# Altium PCB Pulse_sensor2233.PcbDoc
Units mil, origin at the board's own origin, x right, y up, seen from the top; angles counter-clockwise.
Board outline 6000 x 4000 mil, 2 copper layers (Top Layer, Bottom Layer); 14 components, 22 nets, 81 pads, 0 vias.
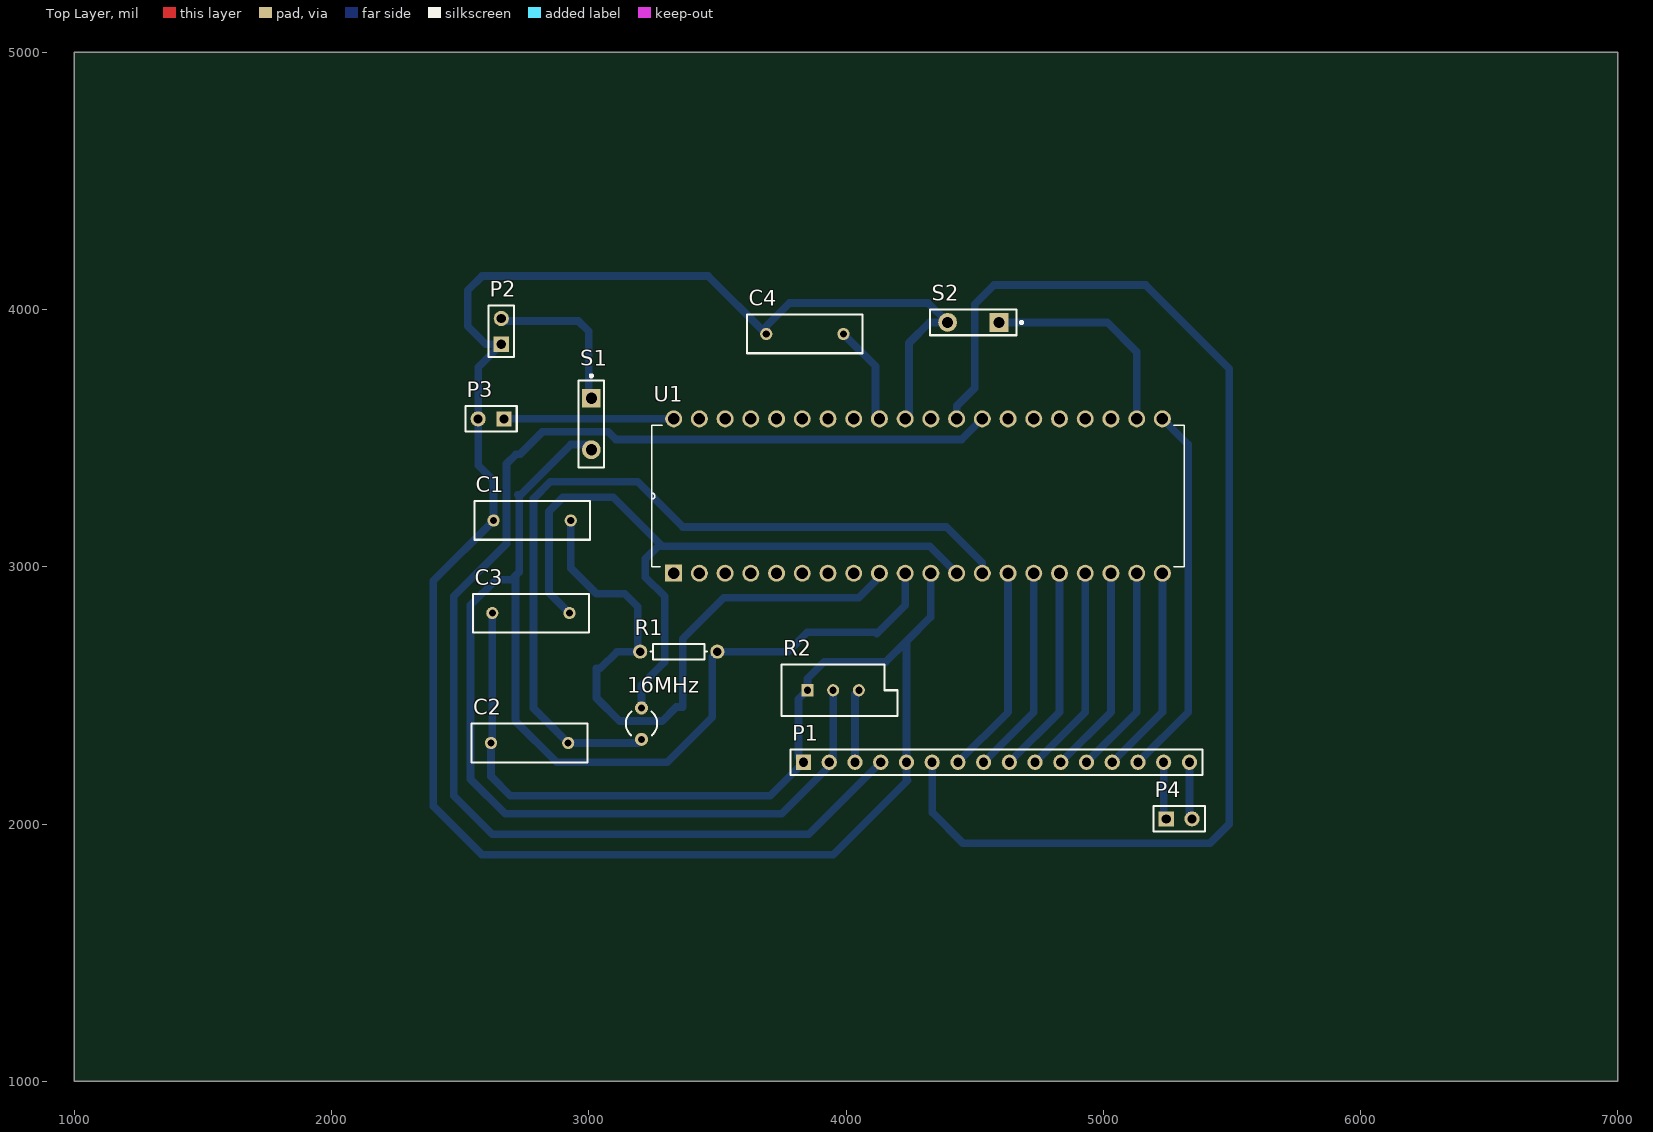
[diagram p0: Top Layer view]
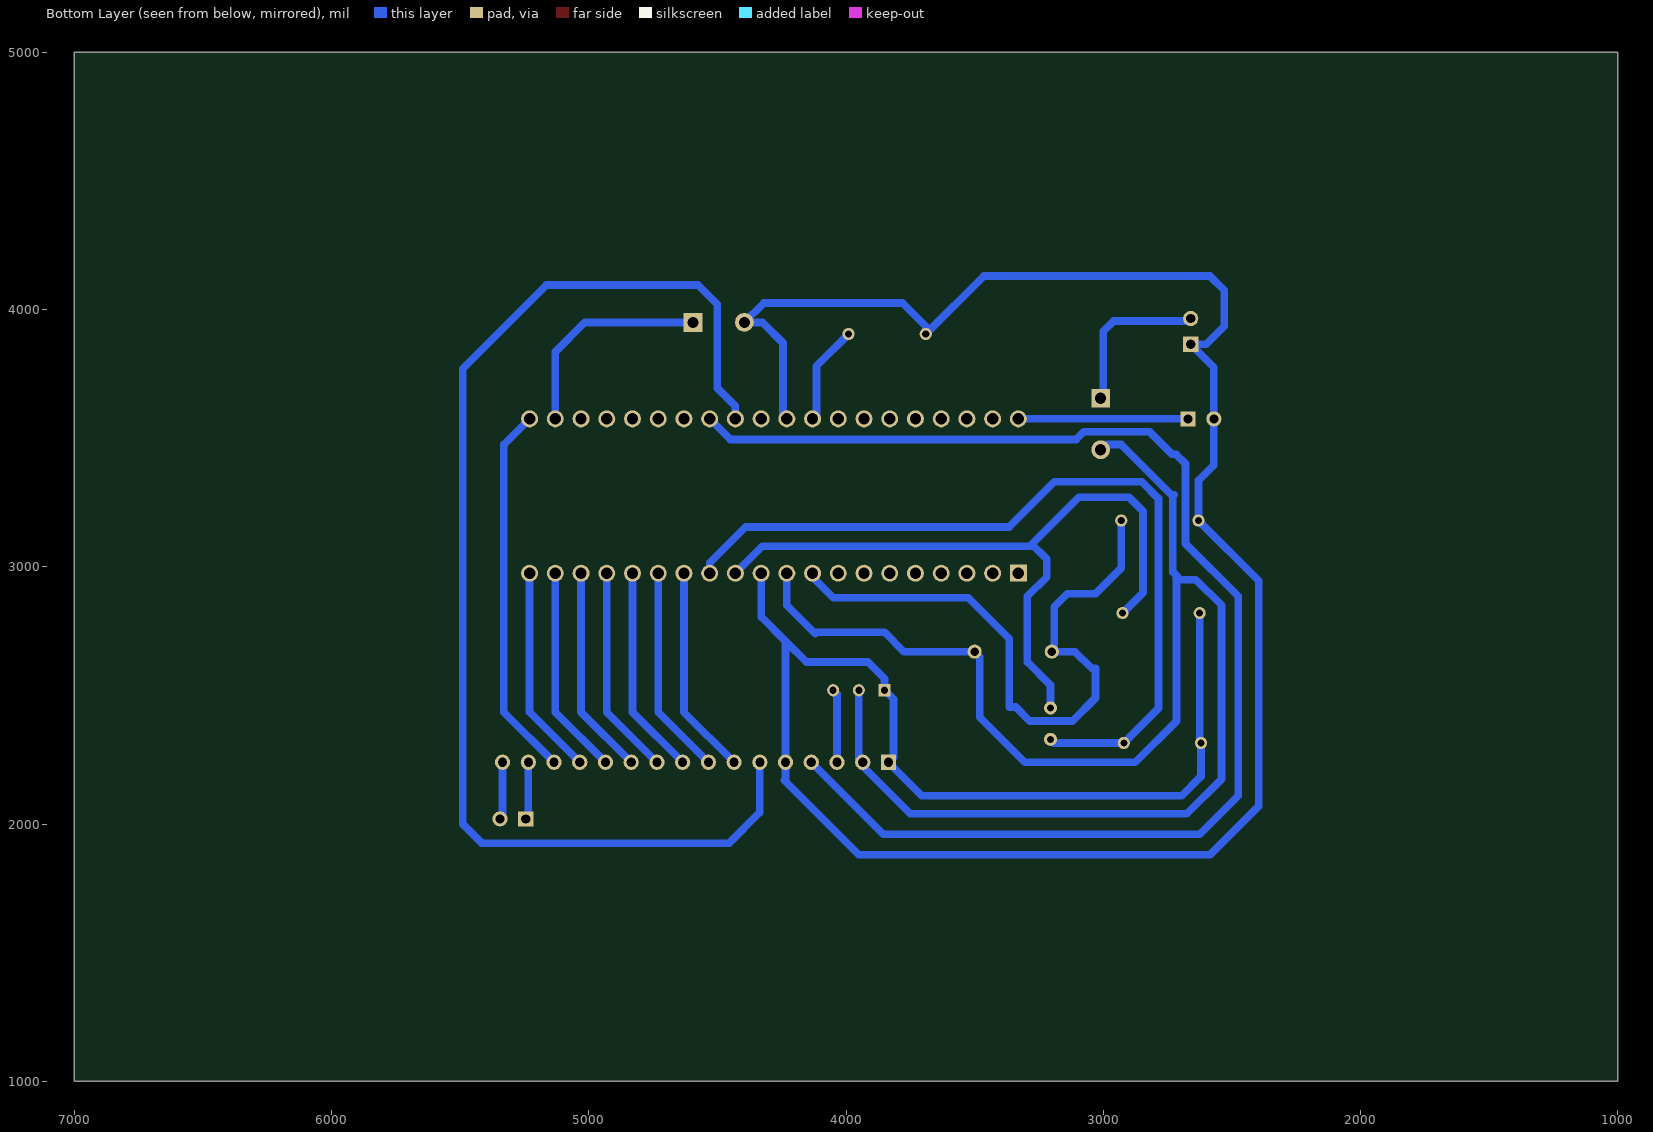
[diagram p1: Bottom Layer view, seen from below]

## Layer stack, top to bottom
Top Solder: solder mask 0.4, Solder Resist, Dk 3.5
Top Layer: signal copper 1.4
Dielectric 1: dielectric 12.6, FR-4, Dk 4.8
Bottom Layer: signal copper 1.4
Bottom Solder: solder mask 0.4, Solder Resist, Dk 3.5

## Board outline
1000,1000 7000,1000 7000,5000 1000,5000

## Design rules (kind name [scope] priority, off if disabled: settings)
Clearance [All] p1: gap=10 ignorepadtopadclearanceinfootprint=FALSE except(0: Arc-Hole Track-Hole SMDPad-Hole THPad-Hole Via-Hole Fill-Hole Poly-Hole Region-Hole Text-Hole)
PolygonConnect [All] p1: connectstyle=Relief reliefconductorwidth=10 reliefentries=4 polygonreliefangle="90 Angle" airgapwidth=10
RoomDefinition Pulse_sensor [InComponentClass('Pulse_sensor')] p1: confinementstyle=ConfineIn formatcopy=TRUE lockcomponents=FALSE outline 2320,1800 5555,1800 5555,4220 2320,4220
RoutingLayers [All] p1: top layer_v5=FALSE bottom layer_v5=TRUE
RoutingVias [All] p1: holewidth=28 width=50 viastyle="Through Hole" minholewidth=28 minwidth=50 maxholewidth=28 maxwidth=50
SolderMaskExpansion [All] p1: expansion=4
Width [All] p1: maxlimit=30 minlimit=10 preferedwidth=30 toplayer_maxwidth=10 toplayer_prefwidth=10 bottomlayer_minwidth=24 minimp=50.000000 maximp=50.000000 favimp=50.000000
29 further rules are at their usual default settings.

## Classes and differential pairs
component class Pulse_sensor: 16MHz C1 C2 C3 C4 P1 P2 P3 R1 R2 S1 S2 U1

## Components (designator, comment, footprint, x,y, rotation, side; value= is the part's Value field where it differs from the comment)
16MHz "Crystal" R38 3205,2390 r180 top
C1 "Cap" RAD-0.3 2780,3180 r0 top value=10uF
C2 "Cap" RAD-0.3 2770,2315 r0 top value=22pF
C3 "Cap" RAD-0.3 2775,2820 r0 top value=22pF
C4 "Cap" RAD-0.3 3840,3905 r0 top value=100nF
P1 "Header 16" HDR1X16 3835,2240 r0 top
P2 "Header 2" HDR1X2 2660,3865 r90 top
P3 "Header 2" HDR1X2 2670,3575 r180 top
P4 "Comment" HDR1X2 5245,2020 r0 top
R1 "Res1" AXIAL-0.3 3350,2670 r0 top value=10K
R2 "RPot" VR5 3950,2520 r0 top value=10K
S1 "SW-SPST" SPST-2 3010,3555 r270 top
S2 "SW-PB" SPST-2 4495,3950 r180 top
U1 "ATMEGA32A-PU" DIP254P1524X482-40 5230,3575 r90 top

## Footprints (in the part's own frame and the unit in brackets; to place one, negate y for a bottom-side part, rotate by r counter-clockwise, add the part's x,y. Pads: shape width x height; smd on the part's side, far side on the other; paste and mask are expansions set on the pad)
AXIAL-0.3 [mm] "Axial Device, Thru-Hole; 2 Leads; 0.3 in Pin Spacing"
  round 1.4 hole 0.85: 1(-3.81,0) 2(3.81,0)
  silkscreen extent -2.77,-0.76 2.77,0.76
DIP254P1524X482-40 [mil]
  rect 66x66 hole 44: 1(-600,1900)
  round 66 hole 44: 2(-600,1800) 3(-600,1700) 4(-600,1600) 5(-600,1500) 6(-600,1400) 7(-600,1300) 8(-600,1200) 9(-600,1100) 10(-600,1000) 11(-600,900) 12(-600,800) 13(-600,700) 14(-600,600) 15(-600,500) 16(-600,400) 17(-600,300) 18(-600,200) 19(-600,100) 20(-600,0) 21(0,0) 22(0,100) 23(0,200) 24(0,300) 25(0,400) 26(0,500) 27(0,600) 28(0,700) 29(0,800) 30(0,900) 31(0,1000) 32(0,1100) 33(0,1200) 34(0,1300) 35(0,1400) 36(0,1500) 37(0,1600) 38(0,1700) 39(0,1800) 40(0,1900)
  silkscreen extent -575,-85 -25,1985
HDR1X2 [mm] "Connector; Header; 2 Position"
  rect 1.5x1.5 hole 0.9: 1(0,0)
  round 1.5 hole 0.9: 2(2.54,0)
  silkscreen extent -1.27,-1.27 3.81,1.27
HDR1X16 [mm] "Connector; Header; 16 Position"
  rect 1.5x1.5 hole 0.9: 1(0,0)
  round 1.5 hole 0.9: 2(2.54,0) 3(5.08,0) 4(7.62,0) 5(10.16,0) 6(12.7,0) 7(15.24,0) 8(17.78,0) 9(20.32,0) 10(22.86,0) 11(25.4,0) 12(27.94,0) 13(30.48,0) 14(33.02,0) 15(35.56,0) 16(38.1,0)
  silkscreen extent -1.27,-1.27 39.37,1.27
R38 [mm] "Crystal, Thru-Hole; 2 Leads; Body 3.1 x 8.2 mm (Dia.xH)"
  round 1.3 hole 0.7: 1(0,1.55) 2(0,-1.55)
  silkscreen extent -1.55,-1.19 1.55,1.17
RAD-0.3 [mm] "Radial Cap, Thru-Hole; 2 Leads; 0.3 in Pin Spacing"
  round 1.2 hole 0.7: 1(-3.81,0) 2(3.81,0)
  silkscreen extent -5.71,-1.91 5.71,1.91
SPST-2 [mm] "Switch; 2 Leads"
  rect 1.85x1.85 hole 1.1: 1(-2.54,0)
  round 1.85 hole 1.1: 2(2.54,0)
  silkscreen extent -4.89,-1.27 4.28,1.27
VR5 [mm] "Thru-Hole; 3 Leads"
  rect 1.2x1.2 hole 0.7: 1(-2.54,0)
  round 1.2 hole 0.7: 2(0,0) 3(2.54,0)
  silkscreen extent -5.08,-2.54 6.35,2.54

## Part data
16MHz: library part XTAL, "Crystal Oscillator", LatestRevisionDate=17-Jul-2002, LatestRevisionNote="Re-released for DXP Platform.", PackageDescription="Crystal, Thru-Hole; 2 Leads; Body 3.1 x 8.2 mm (Dia.xH)", PackageReference=R38, Published=8-Jun-2000, Publisher="Altium Limited"
C1 C2 C3 C4: "Capacitor", LatestRevisionDate=17-Jul-2002, LatestRevisionNote="Re-released for DXP Platform.", PackageDescription="Radial Cap, Thru-Hole; 2 Leads; 0.3 in Pin Spacing", PackageReference=RAD-0.3, Published=8-Jun-2000, Publisher="Altium Limited"
P1: "Header, 16-Pin", LatestRevisionDate=17-Jul-2002, LatestRevisionNote="Re-released for DXP Platform.", Publisher="Altium Limited"
P2 P3: "Header, 2-Pin", LatestRevisionDate=17-Jul-2002, LatestRevisionNote="Re-released for DXP Platform.", Publisher="Altium Limited"
R1: "Resistor", LatestRevisionDate=17-Jul-2002, LatestRevisionNote="Re-released for DXP Platform.", PackageDescription="Axial Device, Thru-Hole; 2 Leads; 0.3 in Pin Spacing", PackageReference=AXIAL-0.3, Published=8-Jun-2000, Publisher="Altium Limited"
R2: "Potentiometer", LatestRevisionDate=17-Jul-2002, LatestRevisionNote="Re-released for DXP Platform.", PackageDescription="Variable Resistor, Thru-Hole; 3 Leads", PackageReference=VR5, Published=8-Jun-2000, Publisher="Altium Limited", Set Position=0.5, Sim Note="Enter the Resistance value and the set point into parameter fields."
S1: "Single-Pole, Single-Throw Switch", LatestRevisionDate=17-Jul-2002, LatestRevisionNote="Re-released for DXP Platform.", PackageDescription="Switch; 2 Leads", PackageReference=SPST-2, Published=24-Mar-1999, Publisher="Altium Limited"
S2: "Switch", LatestRevisionDate=17-Jul-2002, LatestRevisionNote="Re-released for DXP Platform.", PackageDescription="Switch; 2 Leads", PackageReference=SPST-2, Published=24-Mar-1999, Publisher="Altium Limited"
U1: "ATmega Series 16 MHz 32 KB Flash 2 KB SRAM 8-Bit Microcontroller - DIP-40_ÑÒ", Package="PDIP-40 Microchip", Availability=Unavailable, MF=Microchip, MP=ATMEGA32A-PU, Price=None, SnapEDA_Link=https://www.snapeda.com/parts/ATMEGA32A-PU/Microchip/view-part/?ref=snap

## Nets (pads, with @x,y where several pads share a name; then routed paths per layer and width w, separated by ;. In a path a pad name is that pad's centre, name@x,y a point inside that pad or via, vN(x,y) a via of type N, cw(c..) or ccw(c..) an arc to the next point about the centre after c; other vN are vias at no path point)
GND: C1.1 C2.1 C3.1 C4.1 P1.1 P1.5 P2.1 P3.2 R2.1 S2.2 U1.11 U1.31 | length 10437.2
  Bottom Layer w30: C3.1 2625,2320 C2.1 2620,2185 2695,2110 3705,2110 P1.1 3815,2260 3815,2485 R2.1 3850,2565 3915,2630 4155,2630 4235,2710 ; U1.31 4245,3590 4245,3870 4325,3950 S2.2 4320,4025 3780,4025 3690,3935 C4.1 3465,4130 2585,4130 2530,4075 2530,3935 2600,3865 P2.1 2570,3775 P3.2 2570,3395 2630,3335 C1.1 2395,2945 2395,2070 2585,1880 3950,1880 4240,2170 4235,2175 P1.5 4235,2710 ; U1.11 4330,2805 4235,2710
Net16MHz_1: 16MHz.1 C2.2 U1.13 | length 3249.1
  Bottom Layer w30: 16MHz.1 3191.02,2315 C2.2 2785,2450 2785,3265 2850,3330 3190,3330 3365,3155 4390,3155 4530,3015 U1.13 U1.13@4540,2975
Net16MHz_2: 16MHz.2 C3.2 U1.12 | length 2886.8
  Bottom Layer w30: C3.2 2845,2900 2845,3215 2900,3270 3095,3270 3277.5,3087.5 ; 16MHz.2 3205,2540 3295,2630 3295,2885 3220,2960 3220,3030 3277.5,3087.5 ; U1.12 4325,3080 3285,3080 3277.5,3087.5
NetC1_2: C1.2 R1.1 U1.9 | length 2537.7
  Bottom Layer w30: C1.2 2930,2995 3030,2895 3140,2895 3190,2845 3190,2680 R1.1 3110,2670 3045,2605 3030,2605 3030,2490 3120,2400 3285,2400 3340,2455 3365,2455 3365,2720 3525,2880 4050,2880 4130,2960 U1.9
NetC4_2: C4.2 U1.32 | length 388
  Bottom Layer w30: C4.2 4115,3780 4115,3590 U1.32
NetP1_2: P1.2 R1.2 R2.2 S1.2 U1.10 | length 6096.6
  Bottom Layer w30: S1.2 2990,3475 2930,3475 2735,3280 2725,3280 2730,3275 2730,2980 2715,2965 ; R2.2@3945,2525 R2.2 3950,2255 P1.2 3935,2225 3750,2040 2675,2040 2540,2175 2540,2850 2640,2950 2700,2950 2715,2965 ; U1.10 4230,2850 4120,2740 4115,2745 3850,2745 3775,2670 R1.2 3480,2650 3480,2415 3305,2240 2875,2240 2715,2400 2715,2965
NetP1_3: P1.3 R2.3 | length 286.2
  Bottom Layer w30: P1.3 4035,2505 R2.3
NetP1_4: P1.4 U1.28 | length 5160.4
  Bottom Layer w30: P1.4 3855,1960 2625,1960 2475,2110 2475,2885 2680,3090 2680,3400 2717.5,3437.5 2732.5,3437.5 2820,3525 3075,3525 3105,3495 4450,3495 U1.28
NetP1_6: P1.6 U1.29 | length 4830.5
  Bottom Layer w30: P1.6 4335,2045 4455,1925 5415,1925 5490,2000 5490,3770 5165,4095 4575,4095 4500,4020 4500,3695 4430,3625 U1.29
NetP1_7: P1.7 U1.14 | length 815.8
  Bottom Layer w30: P1.7 4630,2435 U1.14
NetP1_8: P1.8 U1.15 | length 815.8
  Bottom Layer w30: P1.8 4730,2435 U1.15
NetP1_9: P1.9 U1.16 | length 815.8
  Bottom Layer w30: P1.9 4830,2435 U1.16
NetP1_10: P1.10 U1.17 | length 815.8
  Bottom Layer w30: P1.10 4930,2435 U1.17
NetP1_11: P1.11 U1.18 | length 815.8
  Bottom Layer w30: P1.11 5030,2435 U1.18
NetP1_12: P1.12 U1.19 | length 815.8
  Bottom Layer w30: P1.12 5130,2435 U1.19
NetP1_13: P1.13 U1.20 | length 815.8
  Bottom Layer w30: P1.13 5230,2435 U1.20
NetP1_14: P1.14 U1.21 | length 1457.2
  Bottom Layer w30: P1.14 5330,2435 5330,3475 U1.21
NetP2_2: P2.2 S1.1 | length 624.9
  Bottom Layer w30: P2.2 2670,3955 2960,3955 3000,3915 3000,3665 S1.1
NetP3_1: P3.1 U1.40 | length 660
  Bottom Layer w30: P3.1 U1.40
NetS2_1: S2.1 U1.22 | length 842.6
  Bottom Layer w30: S2.1 5015,3950 5130,3835 U1.22
NewNet: P1.15 P4.1 | length 224.1
  Bottom Layer w30: P1.15 5235,2030 P4.1
NewNet2: P1.16 P4.2 | length 224.1
  Bottom Layer w30: P1.16 5335,2030 P4.2
pads on no net: U1.1 U1.2 U1.3 U1.4 U1.5 U1.6 U1.7 U1.8 U1.23 U1.24 U1.25 U1.26 U1.27 U1.30 U1.33 U1.34 U1.35 U1.36 U1.37 U1.38 U1.39